# Altium PCB Four-leg robot.PcbDoc
Units mm, origin at the board's own origin, x right, y up, seen from the top; angles counter-clockwise.
Board outline 40.89 x 46.99 mm, 2 copper layers (Top Layer, Bottom Layer); 57 components, 36 nets, 180 pads, 12 vias.
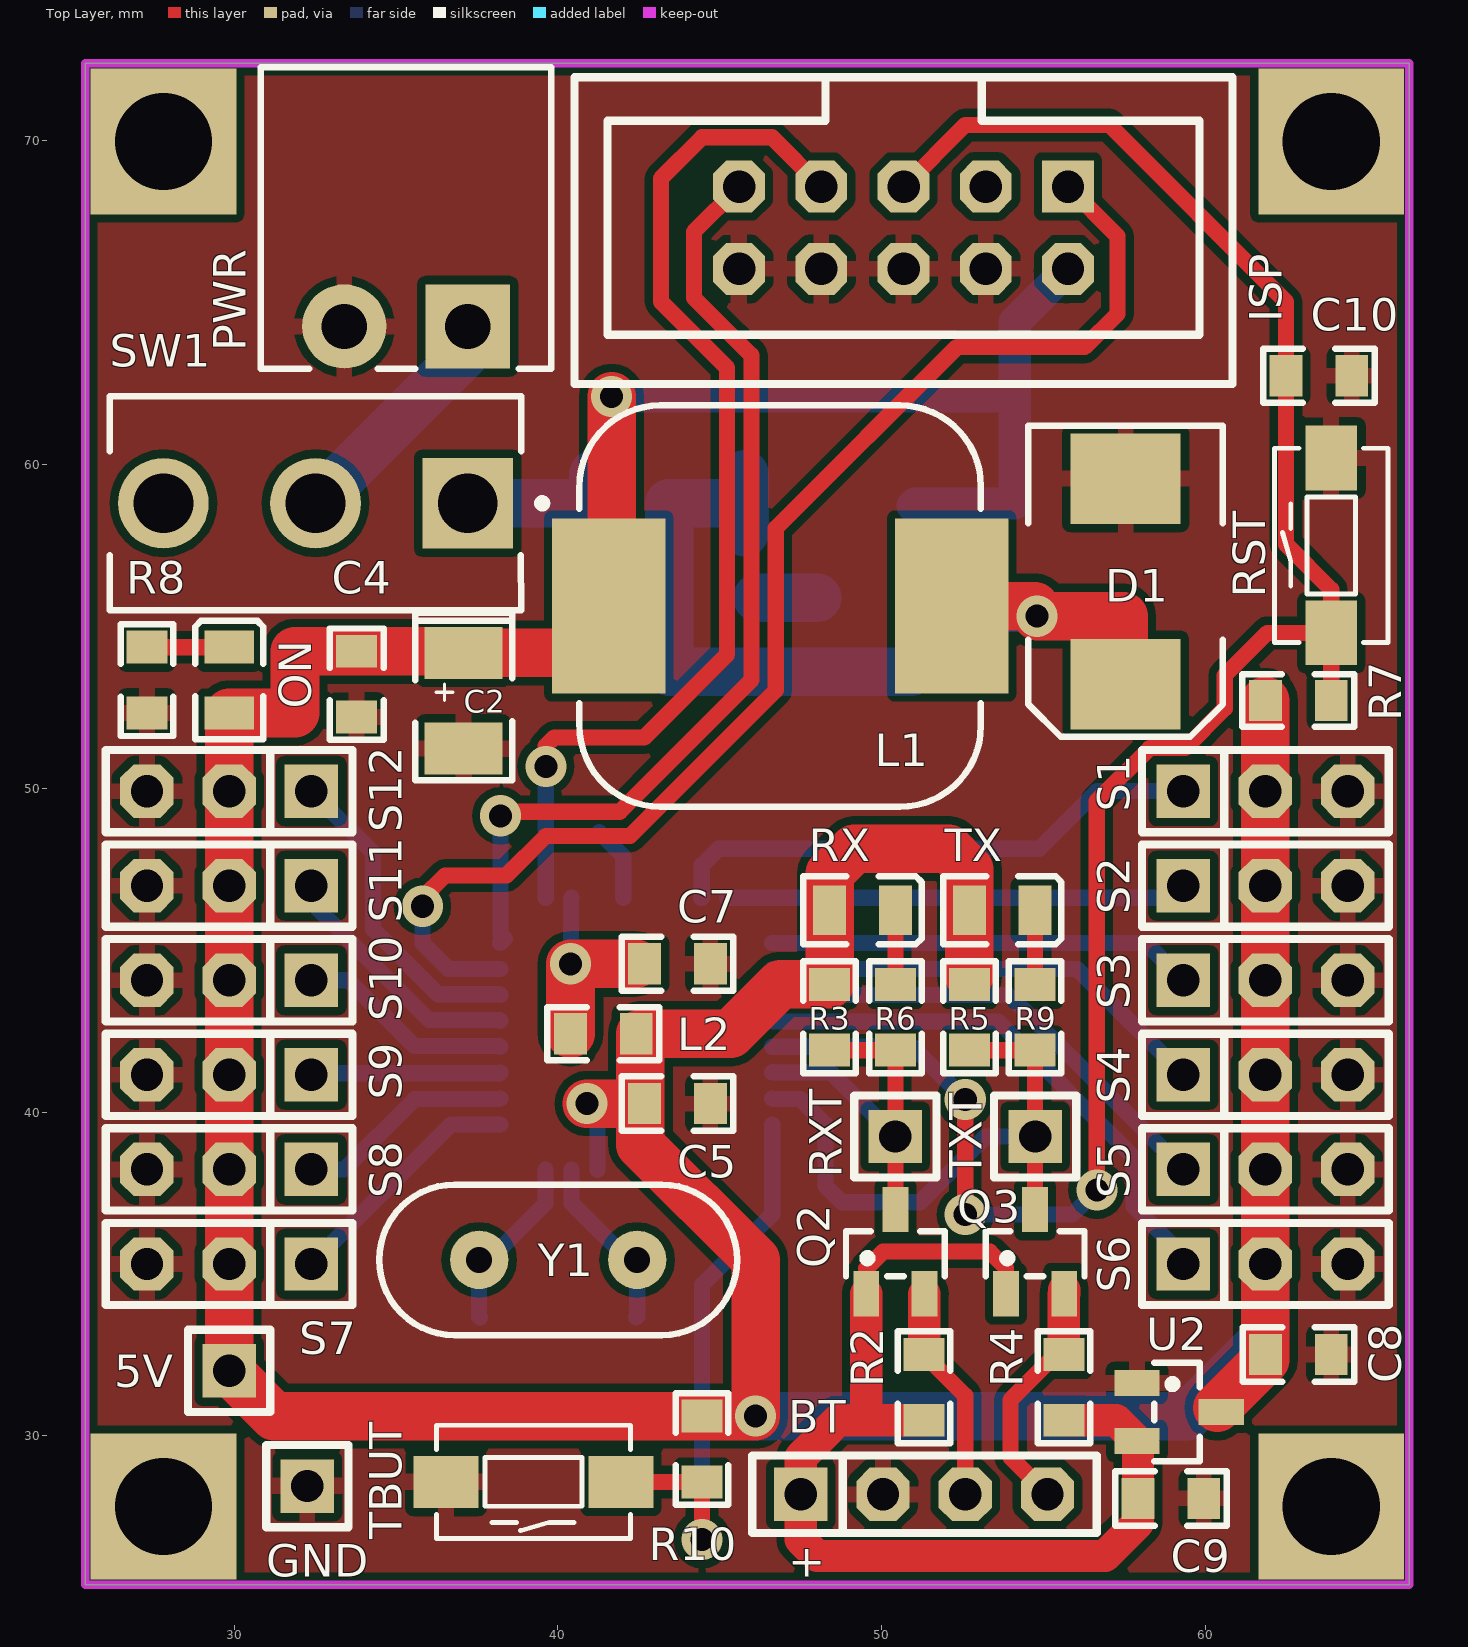
[diagram p0: Top Layer view]
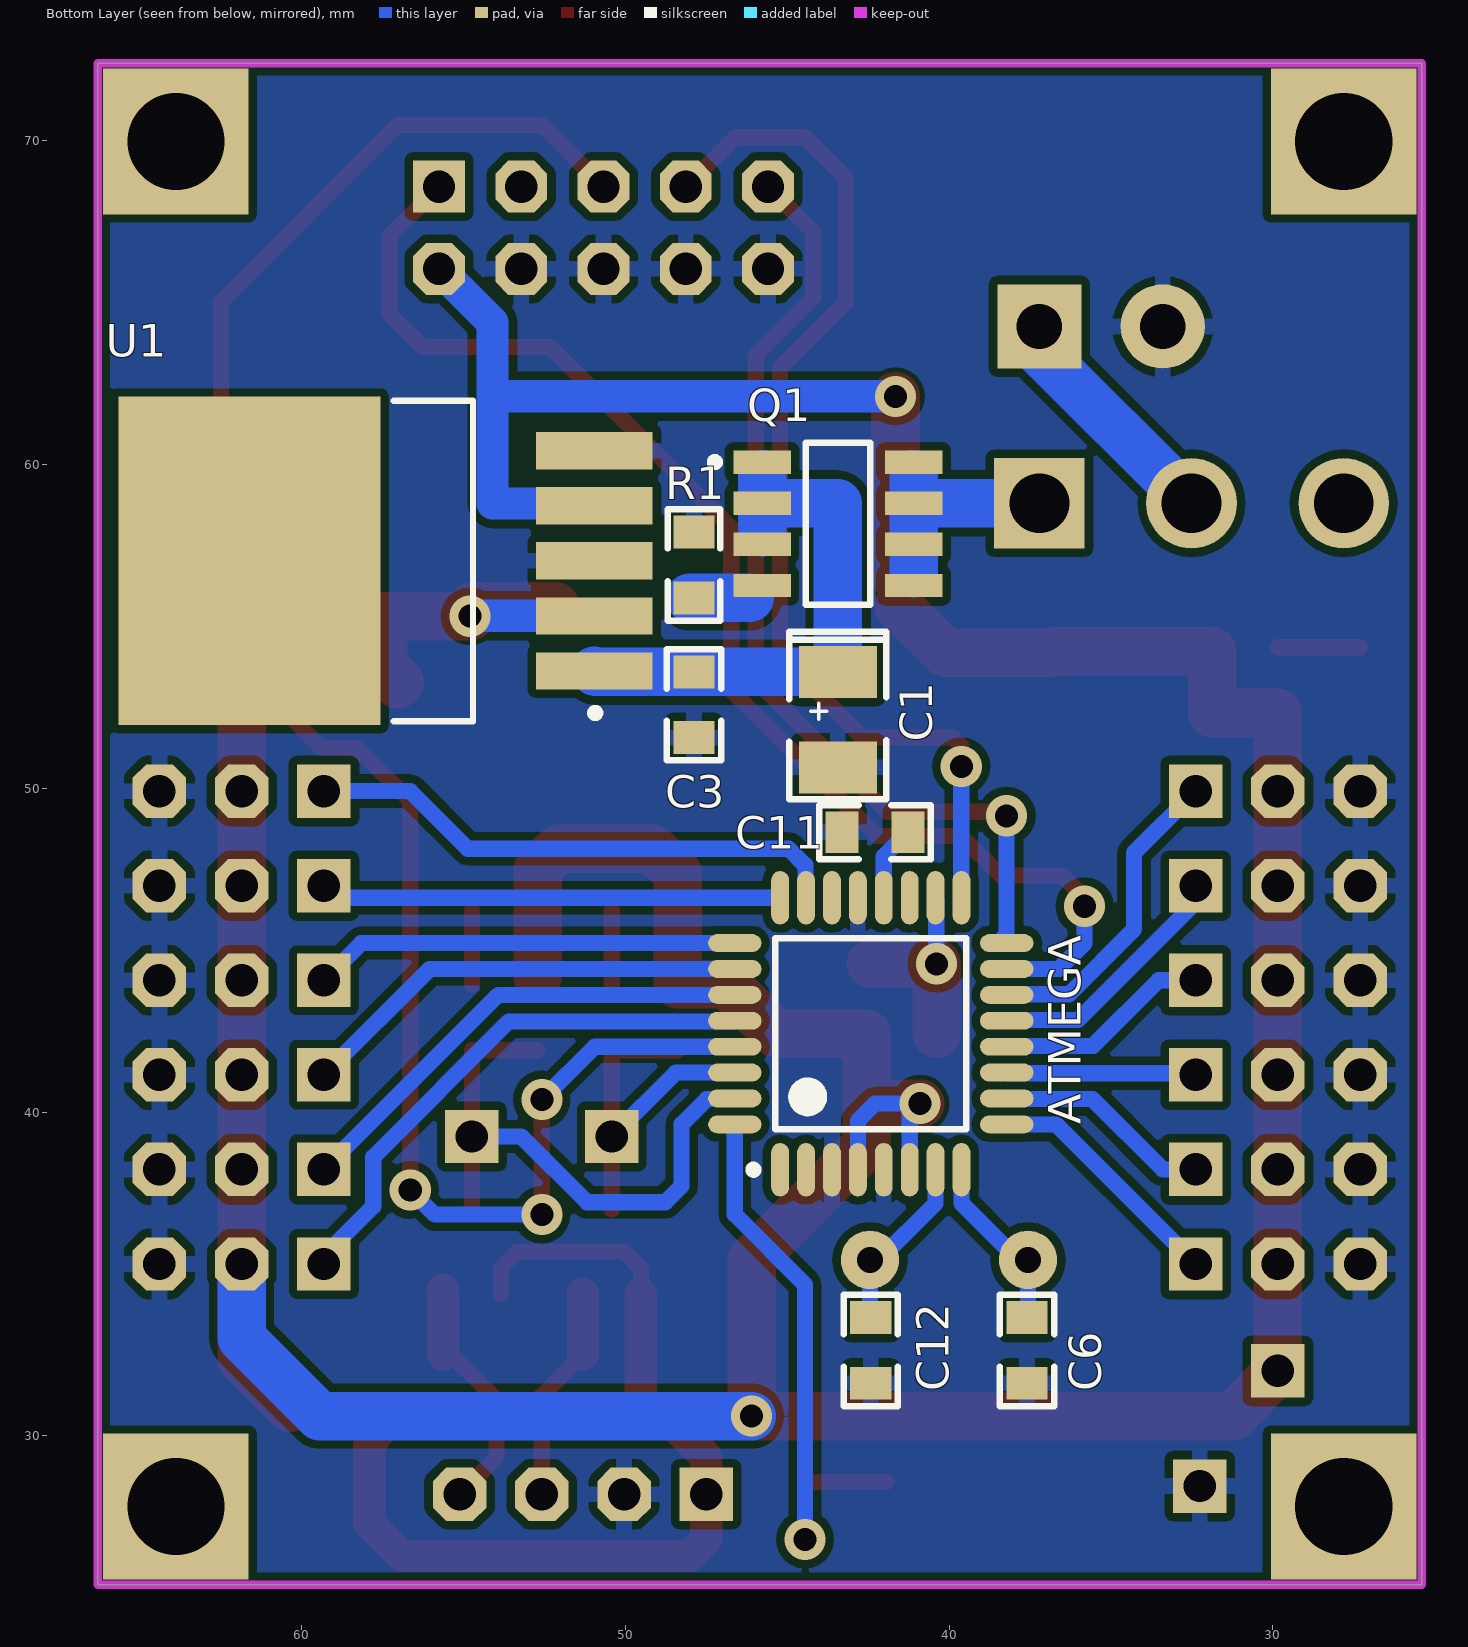
[diagram p1: Bottom Layer view, seen from below]
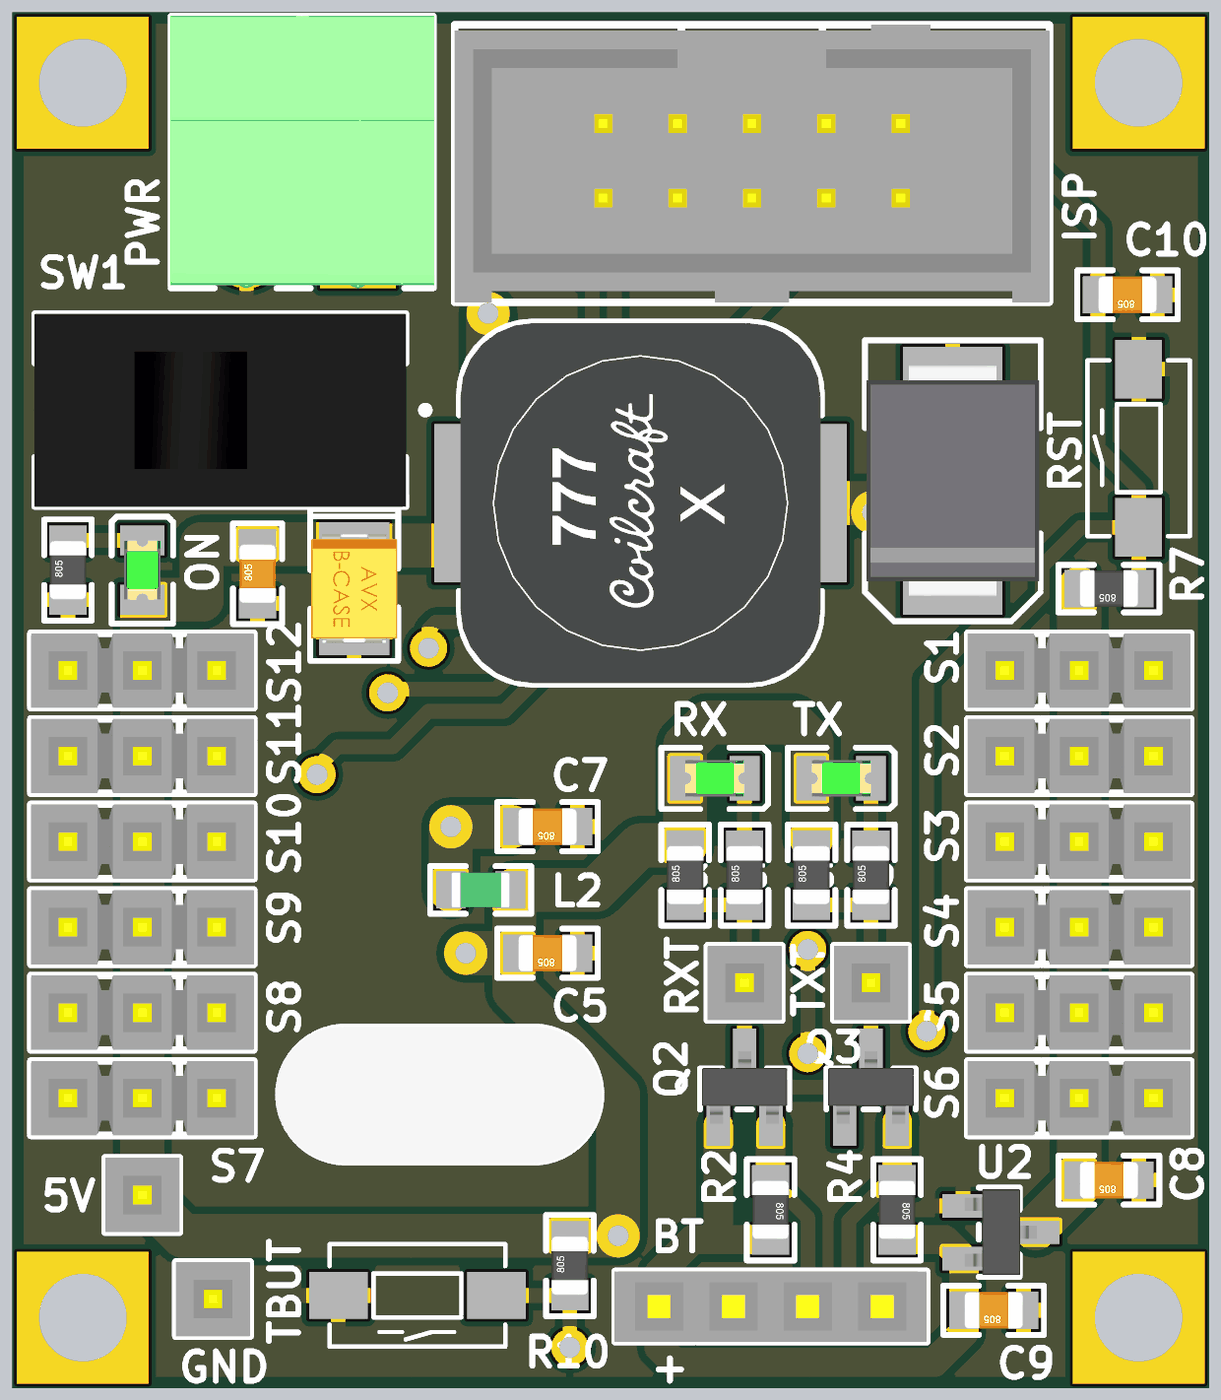
[diagram p2: 3D render of the assembled board from above, using the file's embedded part models]
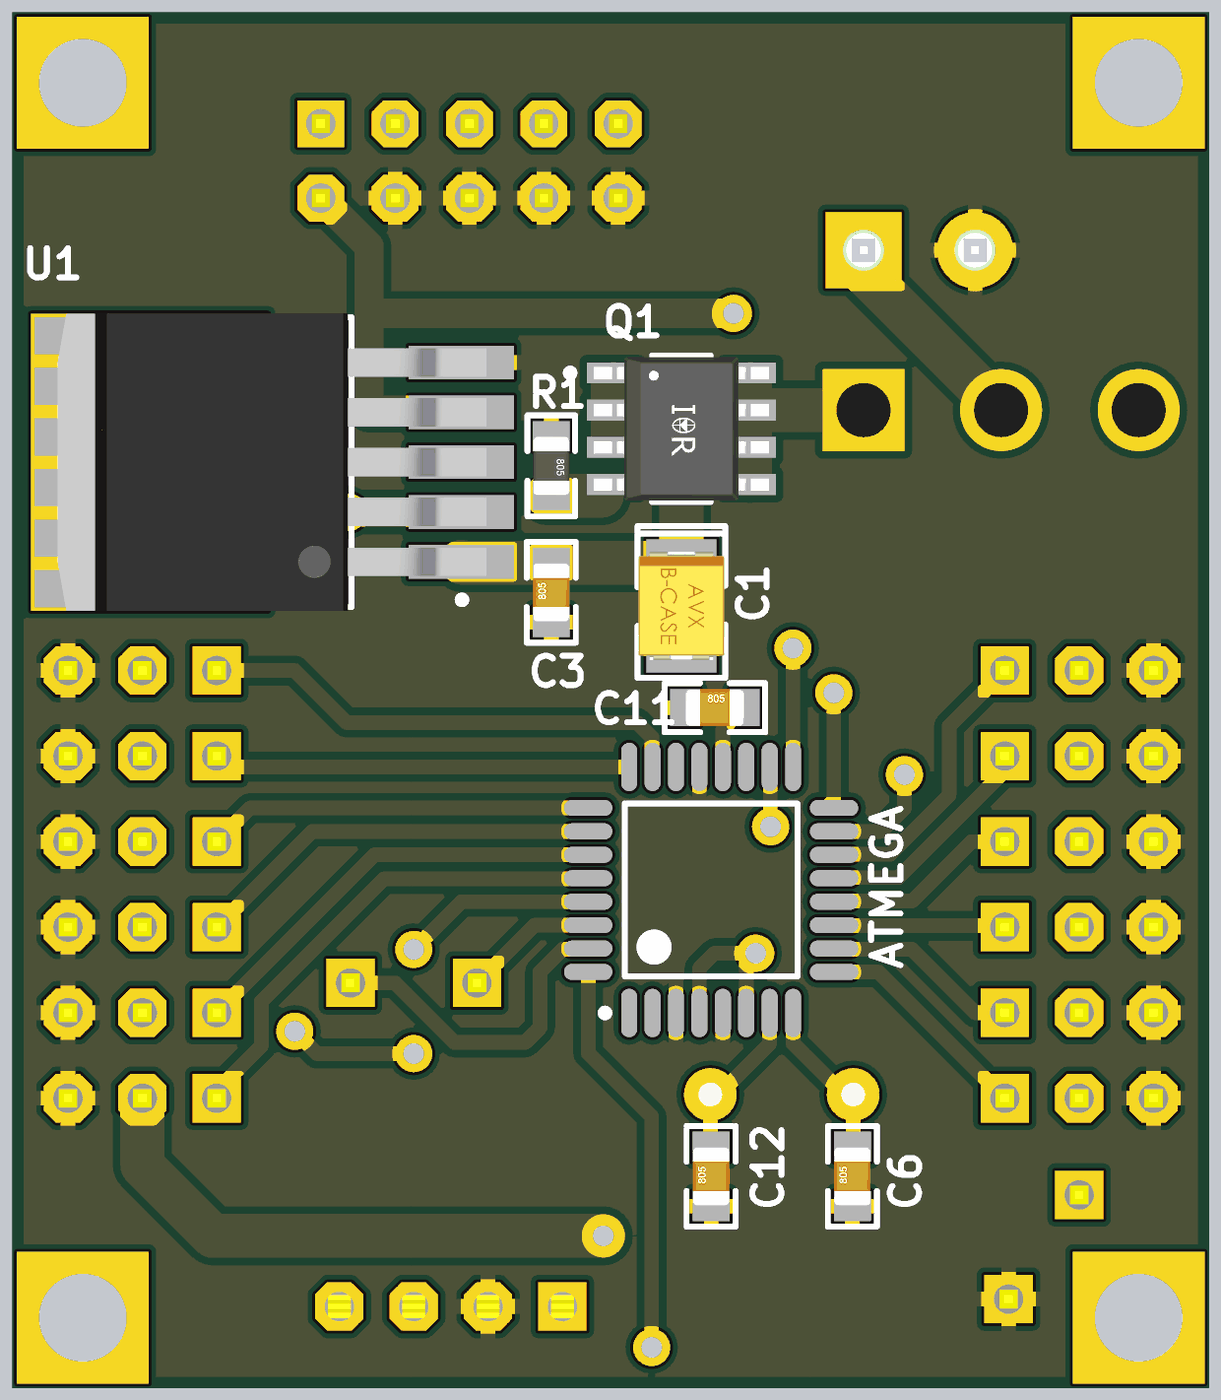
[diagram p3: 3D render of the assembled board from below, using the file's embedded part models]

## Layer stack, top to bottom
Top Solder: solder mask 0.0102, Solder Resist, Dk 3.5
Top Layer: signal copper 0.0356
Dielectric 1: dielectric 0.32, FR-4, Dk 4.8
Bottom Layer: signal copper 0.0356
Bottom Solder: solder mask 0.0102, Solder Resist, Dk 3.5

## Board outline
25.4,25.4 25.4,72.39 66.294,72.39 66.294,25.4

## Design rules (kind name [scope] priority, off if disabled: settings)
Clearance [All] p1: gap=0.254 ignorepadtopadclearanceinfootprint=FALSE except(0: Arc-Hole Track-Hole SMDPad-Hole THPad-Hole Via-Hole Fill-Hole Poly-Hole Region-Hole Text-Hole; 0.1: SMDPad-SMDPad Text-Text)
HoleSize [All] p1: absolutevalues=TRUE maxlimit=3 minlimit=0.025 maxpercent=80.000 minpercent=20.000
MinimumSolderMaskSliver [All] p1: minsoldermaskwidth=0.02
PolygonConnect [All] p1: connectstyle=Relief reliefconductorwidth=0.5 reliefentries=4 polygonreliefangle="90 Angle" airgapwidth=0.254
RoutingVias [All] p1: holewidth=0.711 width=1.27 viastyle="Through Hole" minholewidth=0.711 minwidth=1.27 maxholewidth=0.711 maxwidth=1.27
SilkToSilkClearance [All] p1: silktosilkclearance=0.03
SilkToSolderMaskClearance [IsPad] p1: minsilkscreentomaskgap=0.03 clearancetoexposedcopper=TRUE
SolderMaskExpansion [All] p1: expansion=0.102
Width [All] p1: maxlimit=1.5 minlimit=0.5 preferedwidth=0.5
26 further rules are at their usual default settings.

## Components (designator, comment, footprint, x,y, rotation, side; value= is the part's Value field where it differs from the comment)
5V "CN_1x1" GP_1x1 29.845,32.004 r90 top
ATMEGA "ATmega328P-AU" 32A_N 42.418,42.418 r90 bottom
BT "CN_4x1" GP_4x1_F 47.498,28.194 r0 top
C1 "22uF" SMDB 43.434,52.118 r90 bottom
C2 "22uF" SMDB 37.084,52.705 r90 top
C3 "100nF" C0805 47.879,52.578 r90 bottom
C4 "*" C0805 33.782,53.213 r90 top
C5 "*" C0805 43.688,40.259 r180 top
C6 "*" C0805 37.592,32.639 r90 bottom
C7 "*" C0805 43.688,44.577 r180 top
C8 "*" C0805 62.865,32.512 r180 top
C9 "*" C0805 58.928,28.067 r180 top
C10 "*" C0805 63.5,62.738 r180 top
C11 "*" C0805 42.291,48.641 r180 bottom
C12 "*" C0805 42.418,32.639 r90 bottom
D1 "SK54C / SK84L-TP" SMC 57.531,56.388 r270 top
GND "CN_1x1" GP_1x1 32.258,28.448 r90 top
ISP "IDC Connector" IDC10 50.673,67.31 r180 top
L1 "22uH, 5.0A" DE1209 46.863,55.626 r0 top
L2 "10uH" L0805 41.402,42.418 r180 top
ON "LED" LED0805G 29.845,53.34 r90 top
PWR "15EDGRC-3.81/2P" 15EDGRC-3.81/2P_WO_CN 35.306,64.262 r180 top
Q1 "IRF7425PBF" Infineon_PG-DSO-8_MFG 43.434,58.166 r180 bottom
Q2 "BSS138" SOT-23 50.419,35.687 r0 top
Q3 "BSS138" SOT-23 54.737,35.687 r0 top
R1 "100k" R0805 47.879,56.896 r270 bottom
R2 "" R0805 51.308,31.496 r270 top
R3 "" R0805 48.387,42.926 r90 top
R4 "" R0805 55.626,31.496 r270 top
R5 "" R0805 52.705,42.926 r90 top
R6 "" R0805 50.419,42.926 r90 top
R7 "" R0805 62.865,52.705 r180 top
R8 "" R0805 27.305,53.34 r90 top
R9 "" R0805 54.737,42.926 r90 top
R10 "" R0805 44.45,29.591 r90 top
RST "DTSM31N" DTSM-3 63.881,57.498 r90 top
RX "LED" LED0805G 49.403,46.228 r0 top
RXT "CN_1x1" GP_1x1 50.419,39.243 r90 top
S1 "CN_3x1" GP_3x1 59.309,49.911 r0 top
S2 "CN_3x1" GP_3x1 59.309,46.99 r0 top
S3 "CN_3x1" GP_3x1 59.309,44.069 r0 top
S4 "CN_3x1" GP_3x1 59.309,41.148 r0 top
S5 "CN_3x1" GP_3x1 59.309,38.227 r0 top
S6 "CN_3x1" GP_3x1 59.309,35.306 r0 top
S7 "CN_3x1" GP_3x1 32.385,35.306 r180 top
S8 "CN_3x1" GP_3x1 32.385,38.227 r180 top
S9 "CN_3x1" GP_3x1 32.385,41.148 r180 top
S10 "CN_3x1" GP_3x1 32.385,44.069 r180 top
S11 "CN_3x1" GP_3x1 32.385,46.99 r180 top
S12 "CN_3x1" GP_3x1 32.385,49.911 r180 top
SW1 "Switch_C&K_1101M2S3CQE2_eec" C&K_1101M2S3CQE2_0 32.512,58.801 r180 top
TBUT "DTSM31N" DTSM-3 39.243,28.575 r180 top
TX "LED" LED0805G 53.721,46.228 r0 top
TXT "CN_1x1" GP_1x1 54.737,39.243 r90 top
U1 "AP1501A-50K5G-13" TO-263-5 57.404,57.023 r0 bottom
U2 "MCP1703T-3302E/CB" SOT-23 59.182,30.734 r270 top
Y1 "16 MHz" HC49-S 40.005,35.433 r0 top

## Footprints (in the part's own frame and the unit in brackets; to place one, negate y for a bottom-side part, rotate by r counter-clockwise, add the part's x,y. Pads: shape width x height; smd on the part's side, far side on the other; paste and mask are expansions set on the pad)
15EDGRC-3.81/2P_WO_CN [mm] "Degson 7A, 250V, 2 Pole Plug-in Terminal Block"
  rect 2.6x2.6 hole 1.4: 1(-1.905,0)
  round 2.6 hole 1.4: 2(1.905,0)
  silkscreen extent -4.49,-8 4.49,1.3, body extent -4.5,-8 4.5,1.3, height 7.25
32A_N [mm] "Thin QFP, 32-Leads, Body 7x7mm, Pitch 0.8mm, IPC Medium Density"
  oval 1.65x0.55 smd: 1(-4.2,2.8) 2(-4.2,2) 3(-4.2,1.2) 4(-4.2,0.4) 5(-4.2,-0.4) 6(-4.2,-1.2) 7(-4.2,-2) 8(-4.2,-2.8) 17(4.2,-2.8) 18(4.2,-2) 19(4.2,-1.2) 20(4.2,-0.4) 21(4.2,0.4) 22(4.2,1.2) 23(4.2,2) 24(4.2,2.8)
  oval 0.55x1.65 smd: 9(-2.8,-4.2) 10(-2,-4.2) 11(-1.2,-4.2) 12(-0.4,-4.2) 13(0.4,-4.2) 14(1.2,-4.2) 15(2,-4.2) 16(2.8,-4.2) 25(2.8,4.2) 26(2,4.2) 27(1.2,4.2) 28(0.4,4.2) 29(-0.4,4.2) 30(-1.2,4.2) 31(-2,4.2) 32(-2.8,4.2)
  silkscreen extent -4.32,-2.95 2.95,3.75, body extent -3.5,-3.5 3.5,3.5, height 1.2
C0805 [mil]
  rect 40x50 smd: 1(-40,0) 2(40,0)
  silkscreen extent -68,-33 68,33, body extent -39,-25 39,25, height 31
C&K_1101M2S3CQE2_0 [mm]
  rect 2.8x2.8 hole 1.85 paste-1000 mask+0: 1(-4.7,0)
  round 2.8 hole 1.85 paste-1000 mask+0: 2(0,0) 3(4.7,0)
  silkscreen extent -7.13,-3.3 6.35,3.3, body extent -6.45,-3.4 6.45,3.4, height 0.25
DE1209 [mm] "FERROCORE DE1209 (12x12mm)"
  rect 3.5x5.4 smd: 1(5.3,0) 2(-5.3,0)
  silkscreen extent -6.2,-6.2 6.2,6.2, body extent -6.15,-6.15 6.15,6.15, height 10.21
DTSM-3 [mm]
  rect 2x1.6 smd: 1(-2.7,0) 2(2.7,0)
  silkscreen extent -3,-1.75 3,1.75, body extent -3.6,-1.75 3.6,1.75, height 5
GP_1x1 [mil]
  rect 65x65 hole 39.37: 1(0,0)
  silkscreen extent -50,-50 50,50, body extent -50,-50 50,50, height 330
GP_3x1 [mil]
  rect 65x65 hole 39.37: 1(0,0)
  oct 65x65 hole 39.37: 2(100,0) 3(200,0)
  silkscreen extent -50,-50 250,50, body extent -50,-50 250,50, height 330
GP_4x1_F [mil]
  rect 65x65 hole 39.37: 1(0,0)
  oct 65x65 hole 39.37: 2(100,0) 3(200,0) 4(300,0)
  silkscreen extent -59,-47 360,47, body extent -60,-47 360,48, height 335
HC49-S [mm] "Crystal Oscillator"
  round 1.8 hole 0.8: 1(-2.44,0) 2(2.44,0)
  silkscreen extent -5.53,-2.32 5.53,2.32, body extent -5.62,-2.35 5.55,2.33, height 3.63
IDC10 [mm] "2.54mm, 10 Pin IDC Male Connector"
  rect 1.6x1.6 hole 1: 1(-5.08,-1.27)
  oct 1.6x1.6 hole 1: 2(-5.08,1.27) 3(-2.54,-1.27) 4(-2.54,1.27) 5(0,-1.27) 6(0,1.27) 7(2.54,-1.27) 8(2.54,1.27) 9(5.08,-1.27) 10(5.08,1.27)
  silkscreen extent -10.16,-4.64 10.16,4.83, body extent -10.16,-4.65 10.16,4.83, height 9.27
Infineon_PG-DSO-8_MFG [mm]
  rect 1.78x0.72 smd paste+0 mask+0: 1(-2.34,1.905) 2(-2.34,0.635) 3(-2.34,-0.635) 4(-2.34,-1.905) 5(2.34,-1.905) 6(2.34,-0.635) 7(2.34,0.635) 8(2.34,1.905)
  silkscreen extent -3.93,-2.5 1,2.5, body extent -3,-2.45 3,2.45, height 1.75
L0805 [mil]
  rect 40x50 smd: 1(-40,0) 2(40,0)
  silkscreen extent -68,-32 68,32, body extent -39,-24 39,24, height 37
LED0805G [mil]
  rect 40x60 smd: 1(-40,0) 2(40,0)
  silkscreen extent -72,-41 72,41, body extent -40,-25 40,25, height 43
R0805 [mil]
  rect 40x50 smd: 1(-40,0) 2(40,0)
  silkscreen extent -68,-32 68,32, body extent -39,-25 39,25, height 31
SMC [mm]
  rect 2.8x3.4 smd: 1(-3.175,0) 2(3.175,0)
  silkscreen extent -4.8,-3 4.8,3, body extent -3.98,-2.95 3.97,2.95, height 2.3
SMDB [mm] "SMDB"
  rect 1.6x2.4 smd: 1(1.476,0) 2(-1.475,0)
  silkscreen extent -2.46,-1.5 2.72,1.5, body extent -1.85,-1.46 1.85,1.47, height 2.03
SOT-23 [mm]
  rect 0.8x1.4 smd: 1(-0.9,-1.3) 2(0.9,-1.3) 3(0,1.3)
  silkscreen extent -1.52,-0.76 1.52,0.64, body extent -1.46,-1.25 1.46,1.23, height 1
TO-263-5 [mm] "D2-PAK, 6-Pads, Body 8,9x9,9mm (max), IPC Low Density"
  rect 3.6x1.15 smd: 1(-6.45,3.4) 2(-6.45,1.7) 3(-6.45,0) 4(-6.45,-1.7) 5(-6.45,-3.4)
  rect 8.1x10.15 smd paste-5: 6(4.2,0)
  silkscreen extent -6.6,-4.95 -0.25,4.95, body extent -7.31,-5.08 7.33,5.08, height 4.57

## Part data
ATMEGA: "8-bit AVR Microcontroller, 32KB Flash, 1KB EEPROM, 2KB SRAM, 32-pin TQFP, Industrial Grade (-40°C to 85°C)", Code_JEDEC=MS-026-ABA, ComponentLink1Description="Manufacturer URL", ComponentLink1URL=http://www.atmel.com/, ComponentLink2Description="ATmega48A/48PA/88A/88PA/168A/168PA/328/328P Datasheet", ComponentLink2URL=http://www.atmel.com/dyn/resources/prod_documents/doc8271.pdf, ComponentLink3Description="ATmega48A/48PA/88A/88PA/168A/168PA/328/328P Summary", ComponentLink3URL=http://www.atmel.com/dyn/resources/prod_documents/8271S.pdf, DatasheetVersion="revD, May-2011", PackageDescription="32-Lead, 7x7x1.0 mm Body, 0.8mm Lead Pitch, Thin Profile Plastic Quad Flat Package (TQFP)", PackageReference=32A, PackageVersion="revC, Oct-2010"
C1 C2: library part "Cap Pol Tant", "Polarized Tantalum Capacitor", ComponentLink1Description=datasheet, ComponentLink2Description=supplier
C3 C4 C5 C6 C7 C8 C9 C10 C11 C12: library part Cap, "Capacitor", ComponentLink1Description=datasheet, ComponentLink2Description=supplier
D1: library part SK54C, "Schottky Diode: 40V, 5A", Supplier Part Number 1=1299291, PackageReference=SOT-23, Published=08-Mar-2006, Supplier 1=Farnell
ISP: library part CN_5x2
L1: library part DE1209-22, "DE1209-22", ComponentLink1Description=datasheet, ComponentLink2Description=supplier, Published=08-Mar-2006, Supplier 1=TME, Supplier Part Number 1=DE1209-22
L2: library part Ind2, "Inductor", ComponentLink1Description=datasheet, ComponentLink2Description=supplier, Published=19-Feb-2006
ON RX TX: "Typical RED, GREEN, YELLOW, AMBER GaAs LED", Published=04-Apr-2006
PWR: "Degson 7A, 250V, 2 Pole Plug-in Terminal Block", link=https://www.tme.eu/pl/details/15edgk3.81-02p/listwy-zaciskowe-rozlaczalne/degson-electronics/15edgk-3-81-02p-14-00a-h/
Q2 Q3: "N-Channel Enhancement Mode Vertical DMOS FET", ComponentLink1Description="Manufacturer Link", ComponentLink1URL=http://www.zetex.com/, ComponentLink2Description=Datasheet, ComponentLink2URL=www.zetex.com/3.0/pdf/BSS138.pdf, DatasheetVersion=Mar-96, PackageDescription="SOT-23; 3 Leads; Body 3.1 x 2.5 mm, inc. leads (LxW max), Alternate Lead Configuration", PackageReference=SOT23, PackageVersion=1996, Published=17-Dec-2003, Publisher="Altium Limited"
R1 R2 R3 R4 R5 R6 R7 R8 R9 R10: library part Res, "Resistor", ComponentLink1Description=datasheet, ComponentLink2Description=supplier, Published=19-Feb-2006
RST TBUT: "DIPTRONICS 6x3,5mm SMD Tactile SPST-NO Switch"
SW1: "SWITCH SLIDE SPDT 6A 120V", Digikey Part Number=CKN5001-ND, Manufacturer=C&K, Mouser Part Number=611-1101M2S3CQE2, Package=CONN_PTH_BNC, Part Number=1101M2S3CQE2, Temperature="-30° to +65°", Temperature Range High=+65°, Temperature Range Low=-30°, ComponentLink1Description=Upverter, ComponentLink1URL=https://upverter.com/upn/revision/403d1beb71d14239/, ComponentLink2Description=Datasheet, ComponentLink2URL=https://upverter.com/datasheet/a7139684b05aeea94593aa7ac14a507e079abd51.pdf, Digikey Description="SWITCH SLIDE SPDT 6A 120V", helpURL=https://upverter.com/upn/revision/403d1beb71d14239/, Lead Free=yes, Price=2.74673798286, RoHS=TRUE, Supplier 1=Digi-Key, Supplier 2=Mouser, Supplier Part Number 1=CKN5001-ND, Supplier Part Number 2=611-1101M2S3CQE2
U1: library part AP1501A-33K5G-13, "Voltage stabiliser; PMIC; 5A; TO263-5; SMD; buck; -20A·85Â°C; 800pcs.", Package=None, Availability=Unavailable, MP=AP1501A-50K5G-13, Price=None
U2: "250 mA, 16V, Low Quiescent Current LDO Regulator, 3-Pin SOT-23A, Extended Temperature, Tape and Reel", DatasheetVersion="revD, Sep-2009", PackageDescription="3-Lead Plastic Small Outline Transistor (CB) [SOT-23A]", PackageReference=SOT-23A-CB3, PackageVersion="revBB, Aug-2009", PartNumber=MCP1703T-3302E/CB
Y1: library part XTAL_2PIN, "Crystal Oscillator", ComponentLink1Description=datasheet, ComponentLink2Description=supplier
Q1: inny trans=https://www.tme.eu/pl/details/dmp3036sss-13/tranzystory-z-kanalem-p-smd/diodes-incorporated/, jeszcze inny trans=https://www.tme.eu/pl/details/ao4447a/tranzystory-z-kanalem-p-smd/alpha-omega-semiconductor/, link=https://www.tme.eu/pl/details/irf7425trpbf/tranzystory-z-kanalem-p-smd/infineon-technologies/

## Free pads (board coordinates)
  rect 4.5x4.5 hole 3: 1(27.813,27.813) 1(27.813,69.977) 1(63.881,27.813) 1(63.881,69.977)

## Via types
v1: diameter 1.27, hole 0.711, Top Layer to Bottom Layer, 12 vias

## Nets (pads, with @x,y where several pads share a name; then routed paths per layer and width w, separated by ;. In a path a pad name is that pad's centre, name@x,y a point inside that pad or via, vN(x,y) a via of type N, cw(c..) or ccw(c..) an arc to the next point about the centre after c; other vN are vias at no path point)
3V3: BT.1 C9.2 Q2.1 Q3.1 R2.2 R4.2 U2.2 | length 33.1
  Top Layer w0.5: Q2.1 49.519,35.168 50.038,35.687 53.34,35.687 53.837,35.19 Q3.1
  Top Layer w1: Q2.1 49.519,30.491 49.53,30.48 ; R2.2 49.53,30.48 ; R4.2 57.236,30.48 U2.2 ; U2.2@57.819,29.77 57.912,29.677 C9.2 57.912,27.305 56.896,26.289 48.006,26.289 47.498,26.797 BT.1 47.498,29.337 48.641,30.48 49.53,30.48
5V: 5V.1 ATMEGA.4 ATMEGA.6 C2.1 C4.2 C5.2 C8.2 ISP.2 L1.2 L2.1 ON.1 R3.2 R5.2 R7.2 R10.2 RX.1 S1.2 S2.2 S3.2 S4.2 S5.2 S6.2 S7.2 S8.2 S9.2 S10.2 S11.2 S12.2 TX.1 U1.4 U2.3 | length 161
  Top Layer w1.5: v1(40.894,40.259) C5.2@42.545,40.259 ; L1.2 40.118,54.181 C2.1 36.83,54.181 36.782,54.229 C4.2 31.877,54.229 31.877,52.324 ON.1 S12.2 S11.2 S10.2 S9.2 S8.2 S7.2 5V.1 31.242,30.607 R10.2 v1(46.101,30.607) 46.101,35.433 42.545,38.989 C5.2@42.545,40.259 ; L1.2@41.656,56.549 v1(41.656,62.103) ; R5.2@52.705,44.196 TX.1 52.705,47.498 52.07,48.133 49.149,48.133 48.387,47.371 RX.1 R3.2 46.863,43.942 45.339,42.418 42.545,42.418 C5.2@42.545,40.259 ; ISP.2@55.694,65.981 ISP.2 ; U2.3@60.355,30.861 61.849,32.355 C8.2 S6.2 S5.2 S4.2 S3.2 S2.2 S1.2 R7.2
  Bottom Layer w0.5: ATMEGA.6 41.218,39.935 v1(40.894,40.259) 42.291,40.259 42.818,39.732 ATMEGA.4
  Bottom Layer w1: v1(41.656,62.103) 54.102,62.103 ; U1.4 51.023,58.792 54.102,58.792 54.102,62.103 ; ISP.2 54.102,64.389 54.102,62.103
  Bottom Layer w1.5: v1(46.101,30.607) 59.436,30.607 61.849,33.02 S6.2
AVCC: ATMEGA.18 C7.2 L2.2 | length 6.2
  Top Layer w1.5: L2.2 v1(40.386,44.577) C7.2@42.418,44.577
  Bottom Layer w0.5: v1(40.386,44.577) 40.397,44.588 40.397,46.597 ATMEGA.18
BT_RX: BT.4 Q3.2 R4.1 | length 7.6
  Top Layer w0.5: BT.4 53.975,29.337 53.975,31.115 55.372,32.512 R4.1
  Top Layer w1: R4.1 55.626,34.376 Q3.2 Q3.2@55.637,34.514
BT_TX: BT.3 Q2.2 R2.1 | length 6.7
  Top Layer w0.5: R2.1 52.578,31.242 BT.3
  Top Layer w1: R2.1 51.308,34.376 Q2.2
GND: ATMEGA.3 ATMEGA.5 ATMEGA.21 BT.2 C1.2 C2.2 C3.1 C4.1 C5.1 C6.1 C7.1 C8.1 C9.1 C10.1 C11.1 C12.1 D1.1 GND.1 ISP.4 ISP.6 ISP.8 ISP.10 PWR.2 R1.1 R8.1 RST.2 S1.3 S2.3 S3.3 S4.3 S5.3 S6.3 S7.3 S8.3 S9.3 S10.3 S11.3 S12.3 TBUT.2 U1.3 U1.5 U2.1
MISO: ATMEGA.16 ISP.9 | length 30.1
  Top Layer w0.5: v1(38.227,49.149) 38.354,49.276 41.91,49.276 45.974,53.34 45.974,63.373 44.196,65.151 44.196,67.183 ISP.9
  Bottom Layer w0.5: ATMEGA.16 38.354,45.354 38.227,45.481 v1(38.227,49.149)
MOSI: ATMEGA.15 ISP.1 | length 40.6
  Top Layer w0.5: v1(35.814,46.355) 35.814,46.609 36.512,47.307 38.409,47.307 39.624,48.522 42.222,48.522 46.728,53.028 46.728,58.031 52.324,63.627 56.261,63.627 57.277,64.643 57.277,67.056 ISP.1
  Bottom Layer w0.5: v1(35.814,46.355) 35.814,45.212 36.608,44.418 ATMEGA.15
NetATMEGA_20: ATMEGA.20 C11.2 | length 2.3
  Bottom Layer w0.5: C11.2 42.018,47.898 ATMEGA.20
NetC1_1: C1.1 C3.2 Q1.1 Q1.2 Q1.3 U1.1 | length 16.9
  Bottom Layer w1.5: 45.774,57.912 Q1.2 ; 45.774,59.69 Q1.2 ; U1.1 50.925,53.594 C3.2 C1.1 43.434,58.801 Q1.2
NetD1_2: D1.2 L1.1 U1.2 | length 11.8
  Top Layer w1: v1@54.728,55.626 54.796,55.558 v1(54.796,55.313)
  Top Layer w1.5: L1.1 v1@54.728,55.626 ; v1(54.796,55.313) 57.472,55.313 57.472,53.78 56.964,53.272 D1.2@57.023,53.213
  Bottom Layer w1: U1.2 54.786,55.323 v1(54.796,55.313)
NetON_2: ON.2 R8.2 | length 2.5
  Top Layer w0.5: R8.2 ON.2
NetPWR_1: PWR.1 SW1.2 | length 7.4
  Bottom Layer w1.5: SW1.2 37.211,63.5 PWR.1
NetQ1_4: Q1.4 R1.2 | length 1.9
  Bottom Layer w1.5: 46.155,55.88 R1.2 R1.2@48.006,55.88
NetQ1_5: Q1.5 Q1.6 Q1.7 Q1.8 SW1.1 | length 6.9
  Bottom Layer w1.5: SW1.1 Q1.7 ; 41.094,56.642 Q1.6 Q1.7 ; 41.094,59.69 Q1.7
NetR6_2: R6.2 RX.2 | length 2.3
  Top Layer w0.5: R6.2 RX.2
NetR9_2: R9.2 TX.2 | length 2.3
  Top Layer w0.5: R9.2 TX.2
RESET: ATMEGA.29 C10.2 ISP.5 R7.1 RST.1 | length 64.3
  Top Layer w0.5: ISP.5 52.578,70.485 57.023,70.485 62.484,65.024 C10.2 62.484,57.531 63.881,56.134 RST.1 ; v1(52.578,36.83) v1(52.578,40.386) ; v1(56.642,37.592) 56.642,49.608 58.275,51.24 59.371,51.24 60.595,52.464 60.595,53.483 61.91,54.798 RST.1 ; R7.1 RST.1
  Bottom Layer w0.5: ATMEGA.29 50.946,42.018 v1(52.578,40.386) ; v1(52.578,36.83) 55.88,36.83 v1(56.642,37.592)
RX: ATMEGA.30 Q2.3 R3.1 R6.1 RXT.1 | length 11.6
  Top Layer w0.5: R3.1 R6.1 RXT.1 Q2.3
  Bottom Layer w0.5: ATMEGA.30@46.639,41.239 ATMEGA.30 48.444,41.218 RXT.1
SCK: ATMEGA.17 ISP.7 | length 33.1
  Top Layer w0.5: v1(39.624,50.673) 39.624,51.308 39.883,51.567 42.667,51.567 45.22,54.12 45.22,62.984 43.18,65.024 43.18,68.834 44.45,70.104 46.609,70.104 ISP.7
  Bottom Layer w0.5: ATMEGA.17 39.624,46.624 v1(39.624,50.673)
SERVO1: ATMEGA.23 S1.1 | length 16.8
  Bottom Layer w0.5: ATMEGA.23 44.439,46.618 44.439,47.625 44.45,47.625 44.958,48.133 54.864,48.133 56.642,49.911 S1.1
SERVO2: ATMEGA.24 S2.1 | length 14.2
  Bottom Layer w0.5: ATMEGA.24 58.937,46.618 S2.1
SERVO3: ATMEGA.25 S3.1 | length 13.2
  Bottom Layer w0.5: ATMEGA.25 58.16,45.218 S3.1
SERVO4: ATMEGA.26 S4.1 | length 14
  Bottom Layer w0.5: ATMEGA.26 56.039,44.418 S4.1
SERVO5: ATMEGA.27 S5.1 | length 14.9
  Bottom Layer w0.5: ATMEGA.27 53.918,43.618 S5.1
SERVO6: ATMEGA.28 S6.1 | length 16.8
  Bottom Layer w0.5: ATMEGA.28 46.639,42.797 53.596,42.797 57.785,38.608 57.785,37.084 59.309,35.56 S6.1
SERVO7: ATMEGA.9 S7.1 | length 7.6
  Bottom Layer w0.5: S7.1 36.697,39.618 ATMEGA.9
SERVO8: ATMEGA.10 S8.1 | length 6.7
  Bottom Layer w0.5: S8.1 33.401,38.227 35.571,40.397 38.197,40.397 ATMEGA.10
SERVO9: ATMEGA.11 S9.1 | length 5.9
  Bottom Layer w0.5: S9.1 32.385,41.197 38.197,41.197 ATMEGA.11
SERVO10: ATMEGA.12 S10.1 | length 6.7
  Bottom Layer w0.5: S10.1 33.528,44.069 35.558,42.039 38.197,42.039 ATMEGA.12
SERVO11: ATMEGA.13 S11.1 | length 7.9
  Bottom Layer w0.5: S11.1 32.385,46.482 36.028,42.839 38.197,42.839 ATMEGA.13
SERVO12: ATMEGA.14 S12.1 | length 9.8
  Bottom Layer w0.5: S12.1 34.29,48.006 34.29,45.643 36.294,43.639 38.197,43.639 ATMEGA.14
TEST_BUT: ATMEGA.32 R10.1 TBUT.1 | length 18
  Top Layer w0.5: TBUT.1 R10.1 v1(44.45,26.797)
  Bottom Layer w0.5: v1(44.45,26.797) 44.45,34.671 46.618,36.839 ATMEGA.32
TX: ATMEGA.31 Q3.3 R5.1 R9.1 TXT.1 | length 18.4
  Top Layer w0.5: R5.1 R9.1 TXT.1 Q3.3 Q3.3@54.767,36.987
  Bottom Layer w0.5: ATMEGA.31 46.639,40.397 47.491,40.397 48.26,39.628 48.26,37.719 48.768,37.211 51.181,37.211 53.213,39.243 TXT.1
XTAL1: ATMEGA.7 C12.2 Y1.2 | length 5.6
  Bottom Layer w0.5: ATMEGA.7 40.418,37.179 42.164,35.433 Y1.2 42.445,33.682 C12.2
XTAL2: ATMEGA.8 C6.2 Y1.1 | length 5.6
  Bottom Layer w0.5: C6.2 37.565,33.682 Y1.1 Y1.1@37.846,35.433 ; Y1.1@37.872,35.433 39.618,37.179 ATMEGA.8
pads on no net: ATMEGA.1 ATMEGA.2 ATMEGA.19 ATMEGA.22 ISP.3 SW1.3 U1.6

## Polygon pours and split planes (outlines as drawn)
GND on Top Layer "Top Layer-GND" (solid, pour order 6): 25.4,72.39 66.294,72.39 66.294,25.4 25.4,25.4
GND on Bottom Layer "Bottom Layer-GND" (solid, pour order 12): 25.4,72.39 66.294,72.39 66.294,25.4 25.4,25.4

## Keep-outs
Keep-Out Layer:
  the board outline again, w0.254

## Silkscreen, mask and mechanical layers (free items; w line width, h text height)
Top Overlay:
  text "+" at 47.117,25.654 h1